# Altium PCB multiplexor checkpoint1.PcbDoc (part 1 of 2)
Units mil, origin at the board's own origin, x right, y up, seen from the top; angles counter-clockwise.
Board outline 12250 x 17250 mil, 4 copper layers (Top Layer, Middle 1, Middle 2, Bottom Layer), stack 59.2 mil thick; 172 components, 213 nets, 892 pads, 91 vias.
Unrouted connection lines stored in the file: 234.
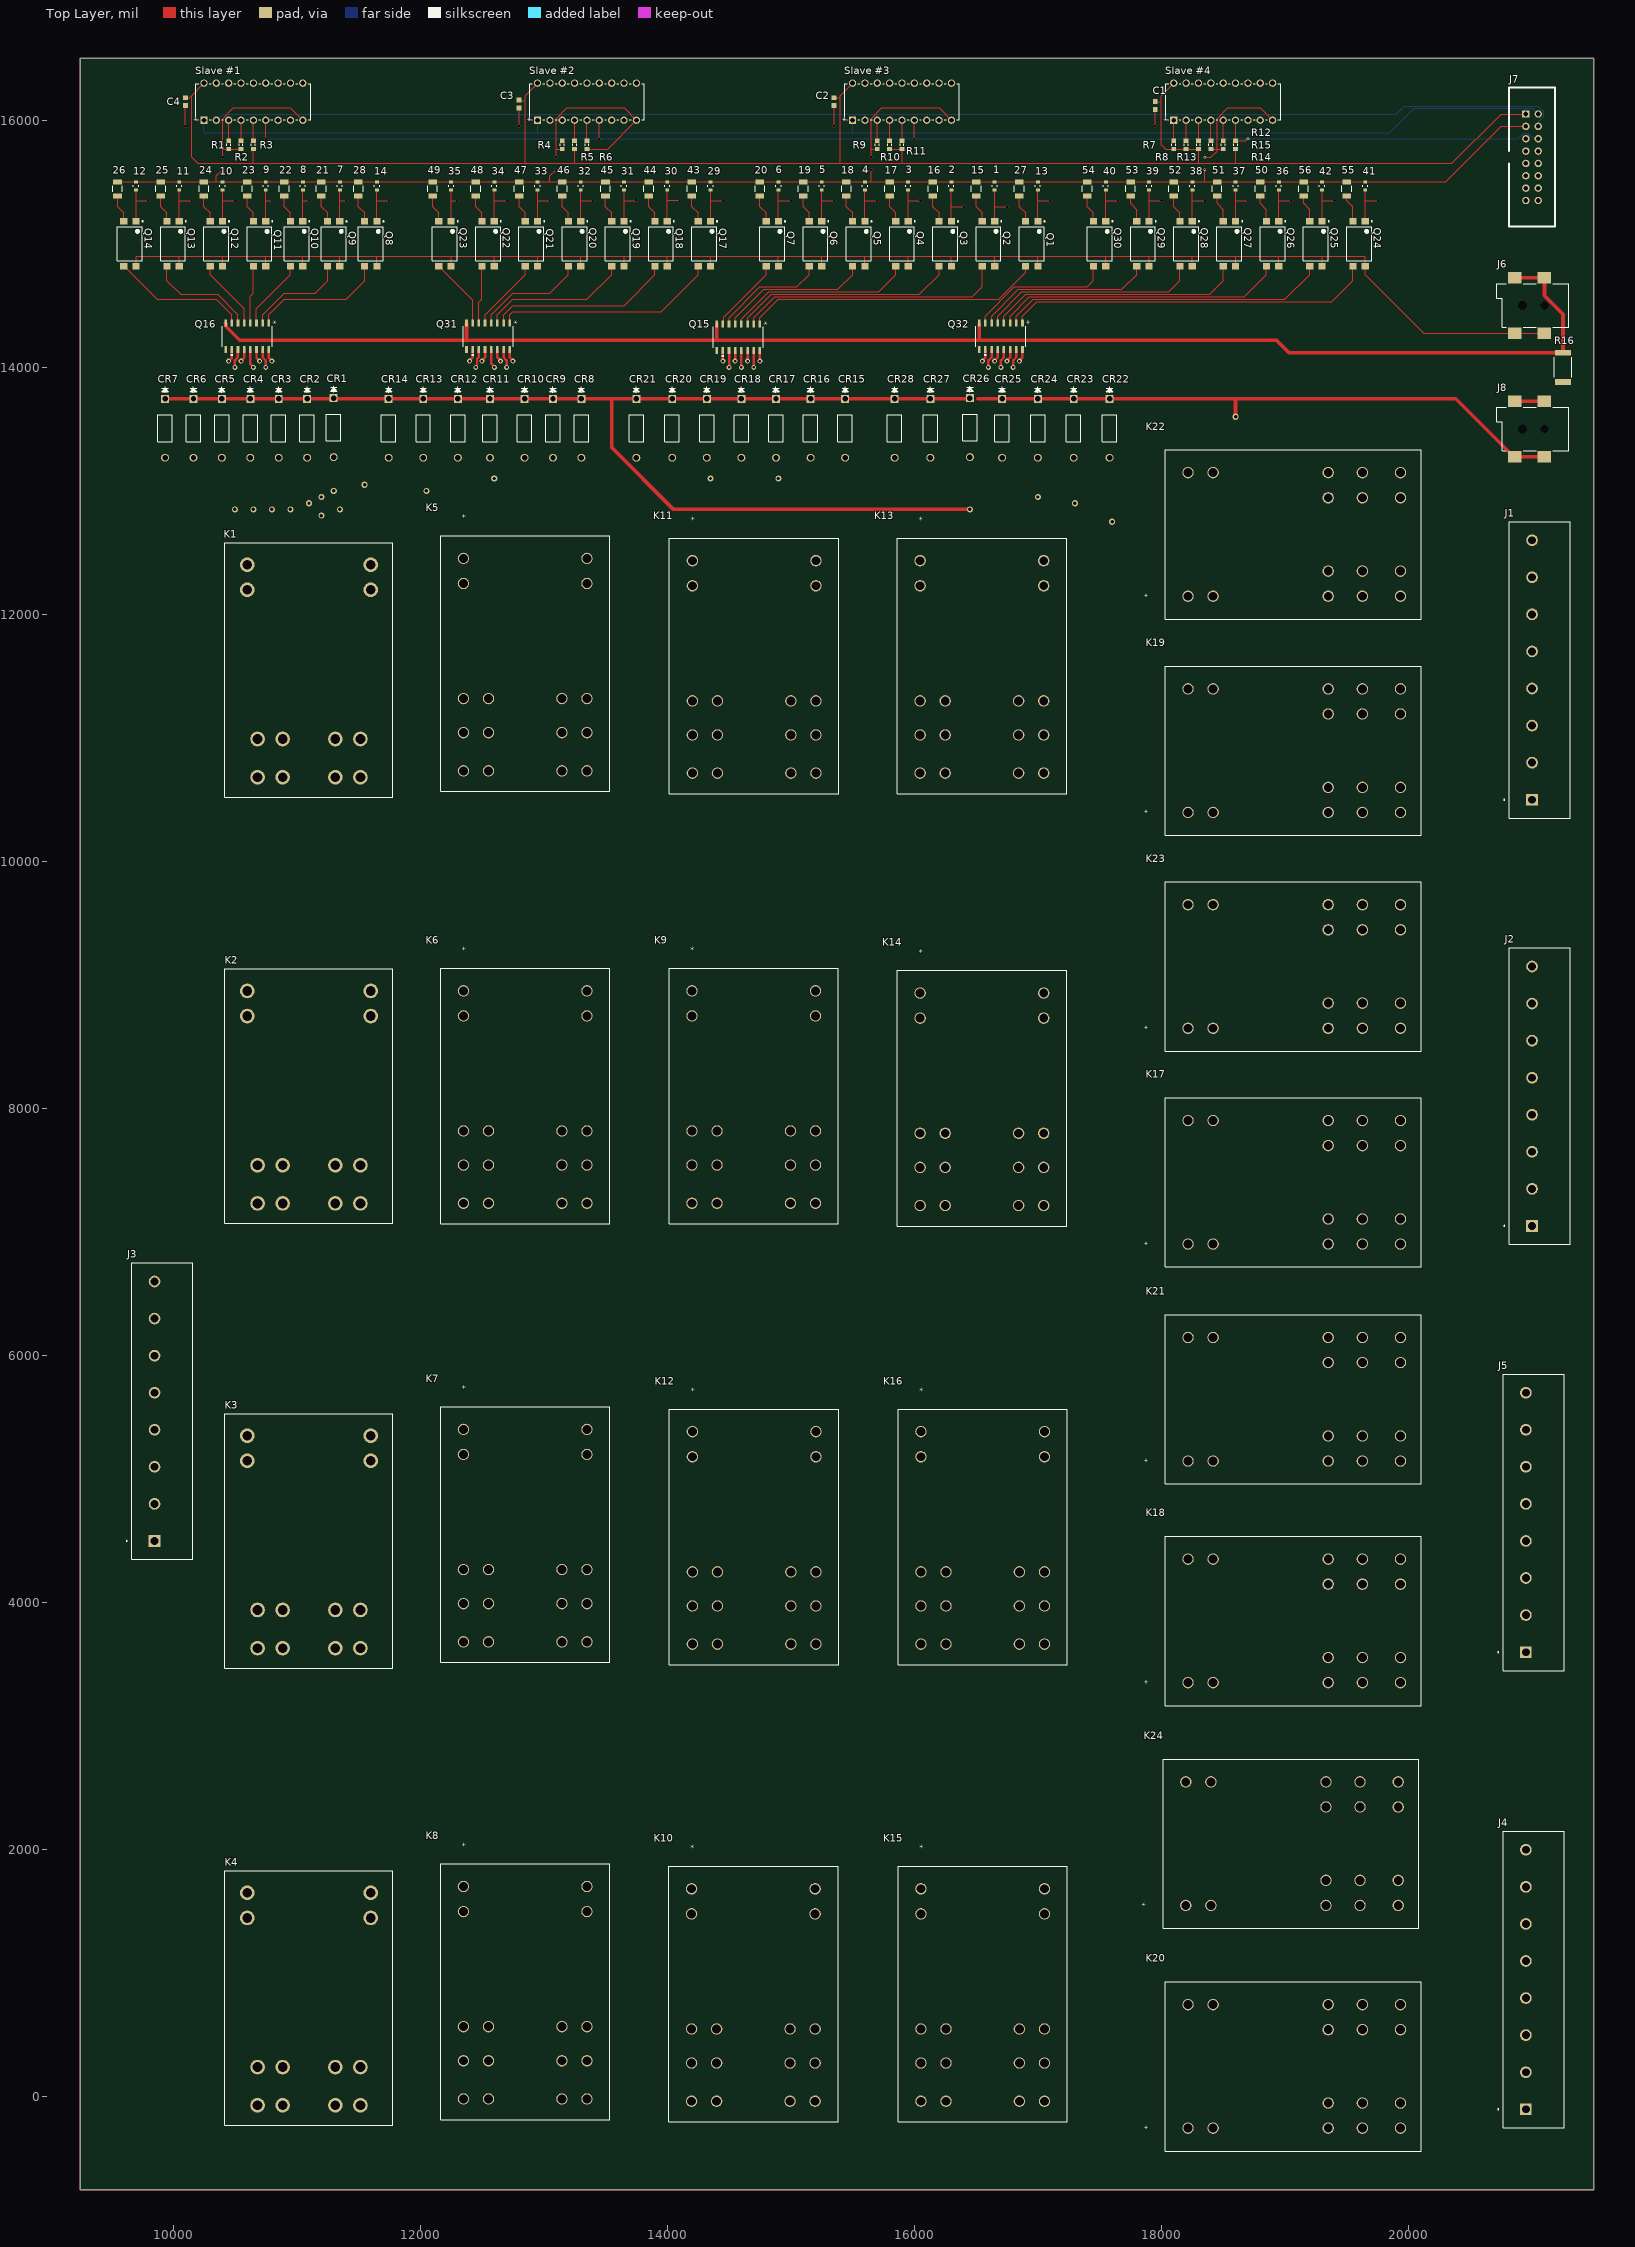
[diagram p0: Top Layer view]
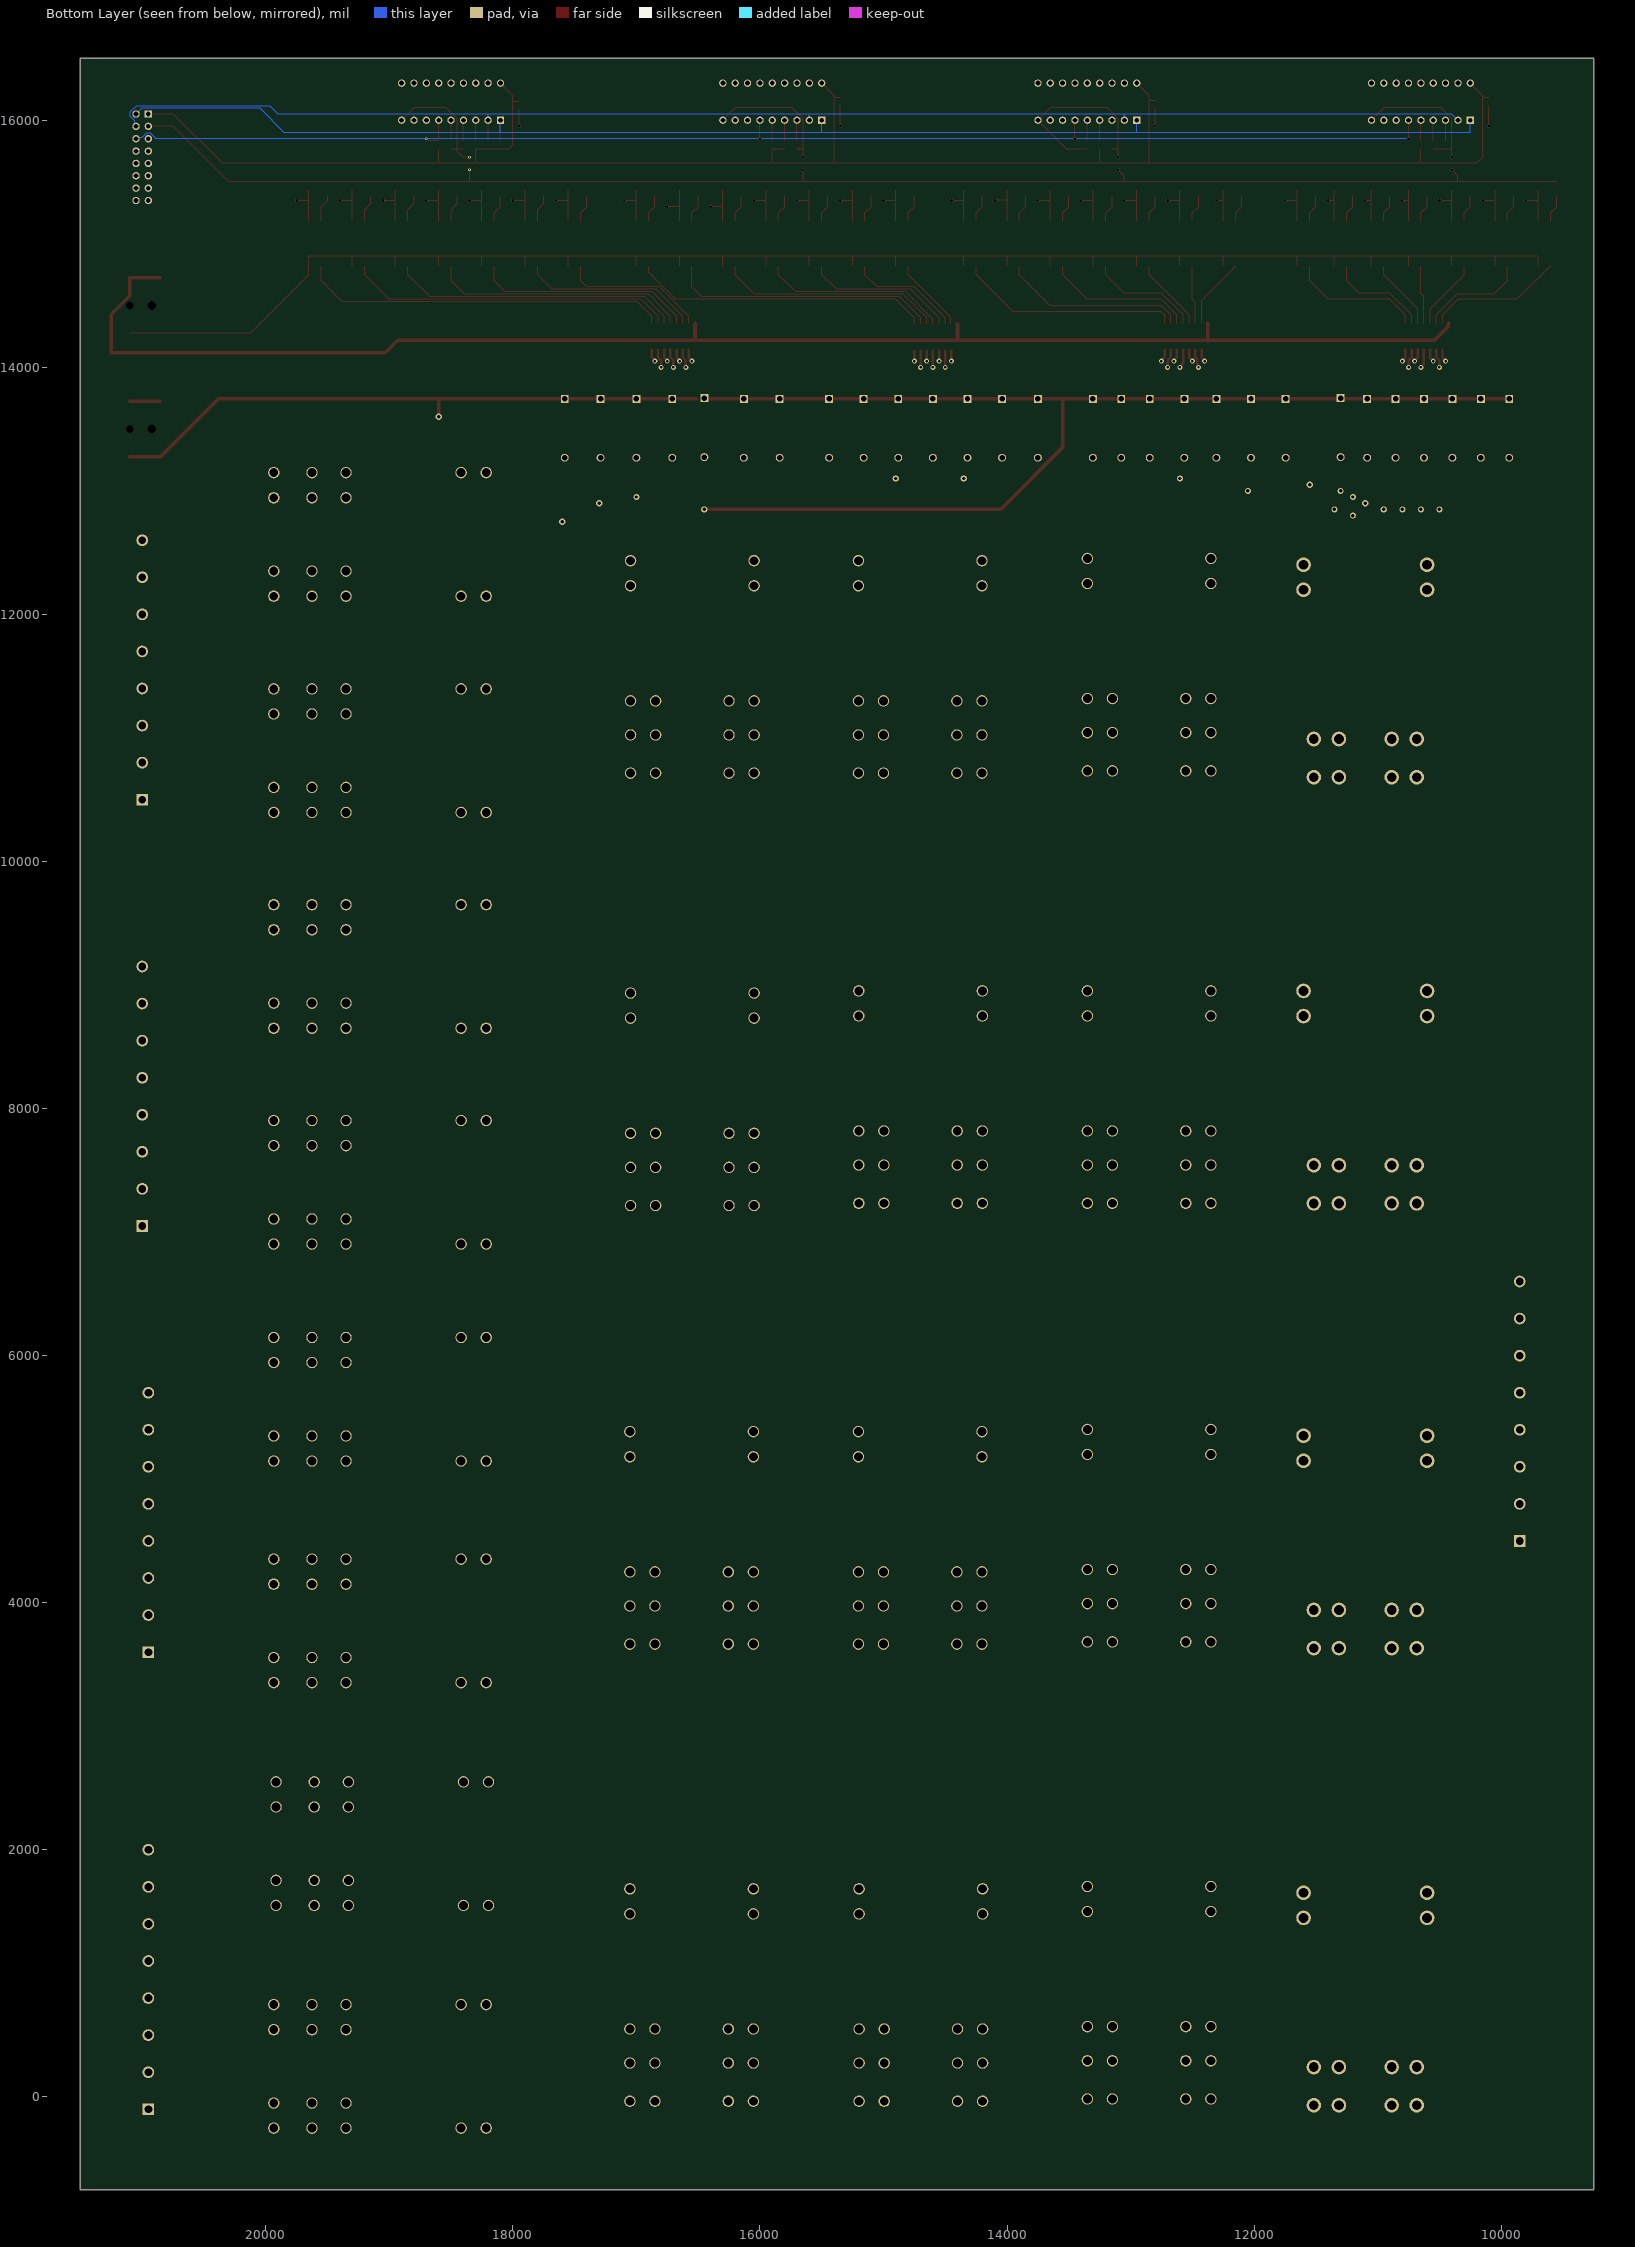
[diagram p1: Bottom Layer view, seen from below]
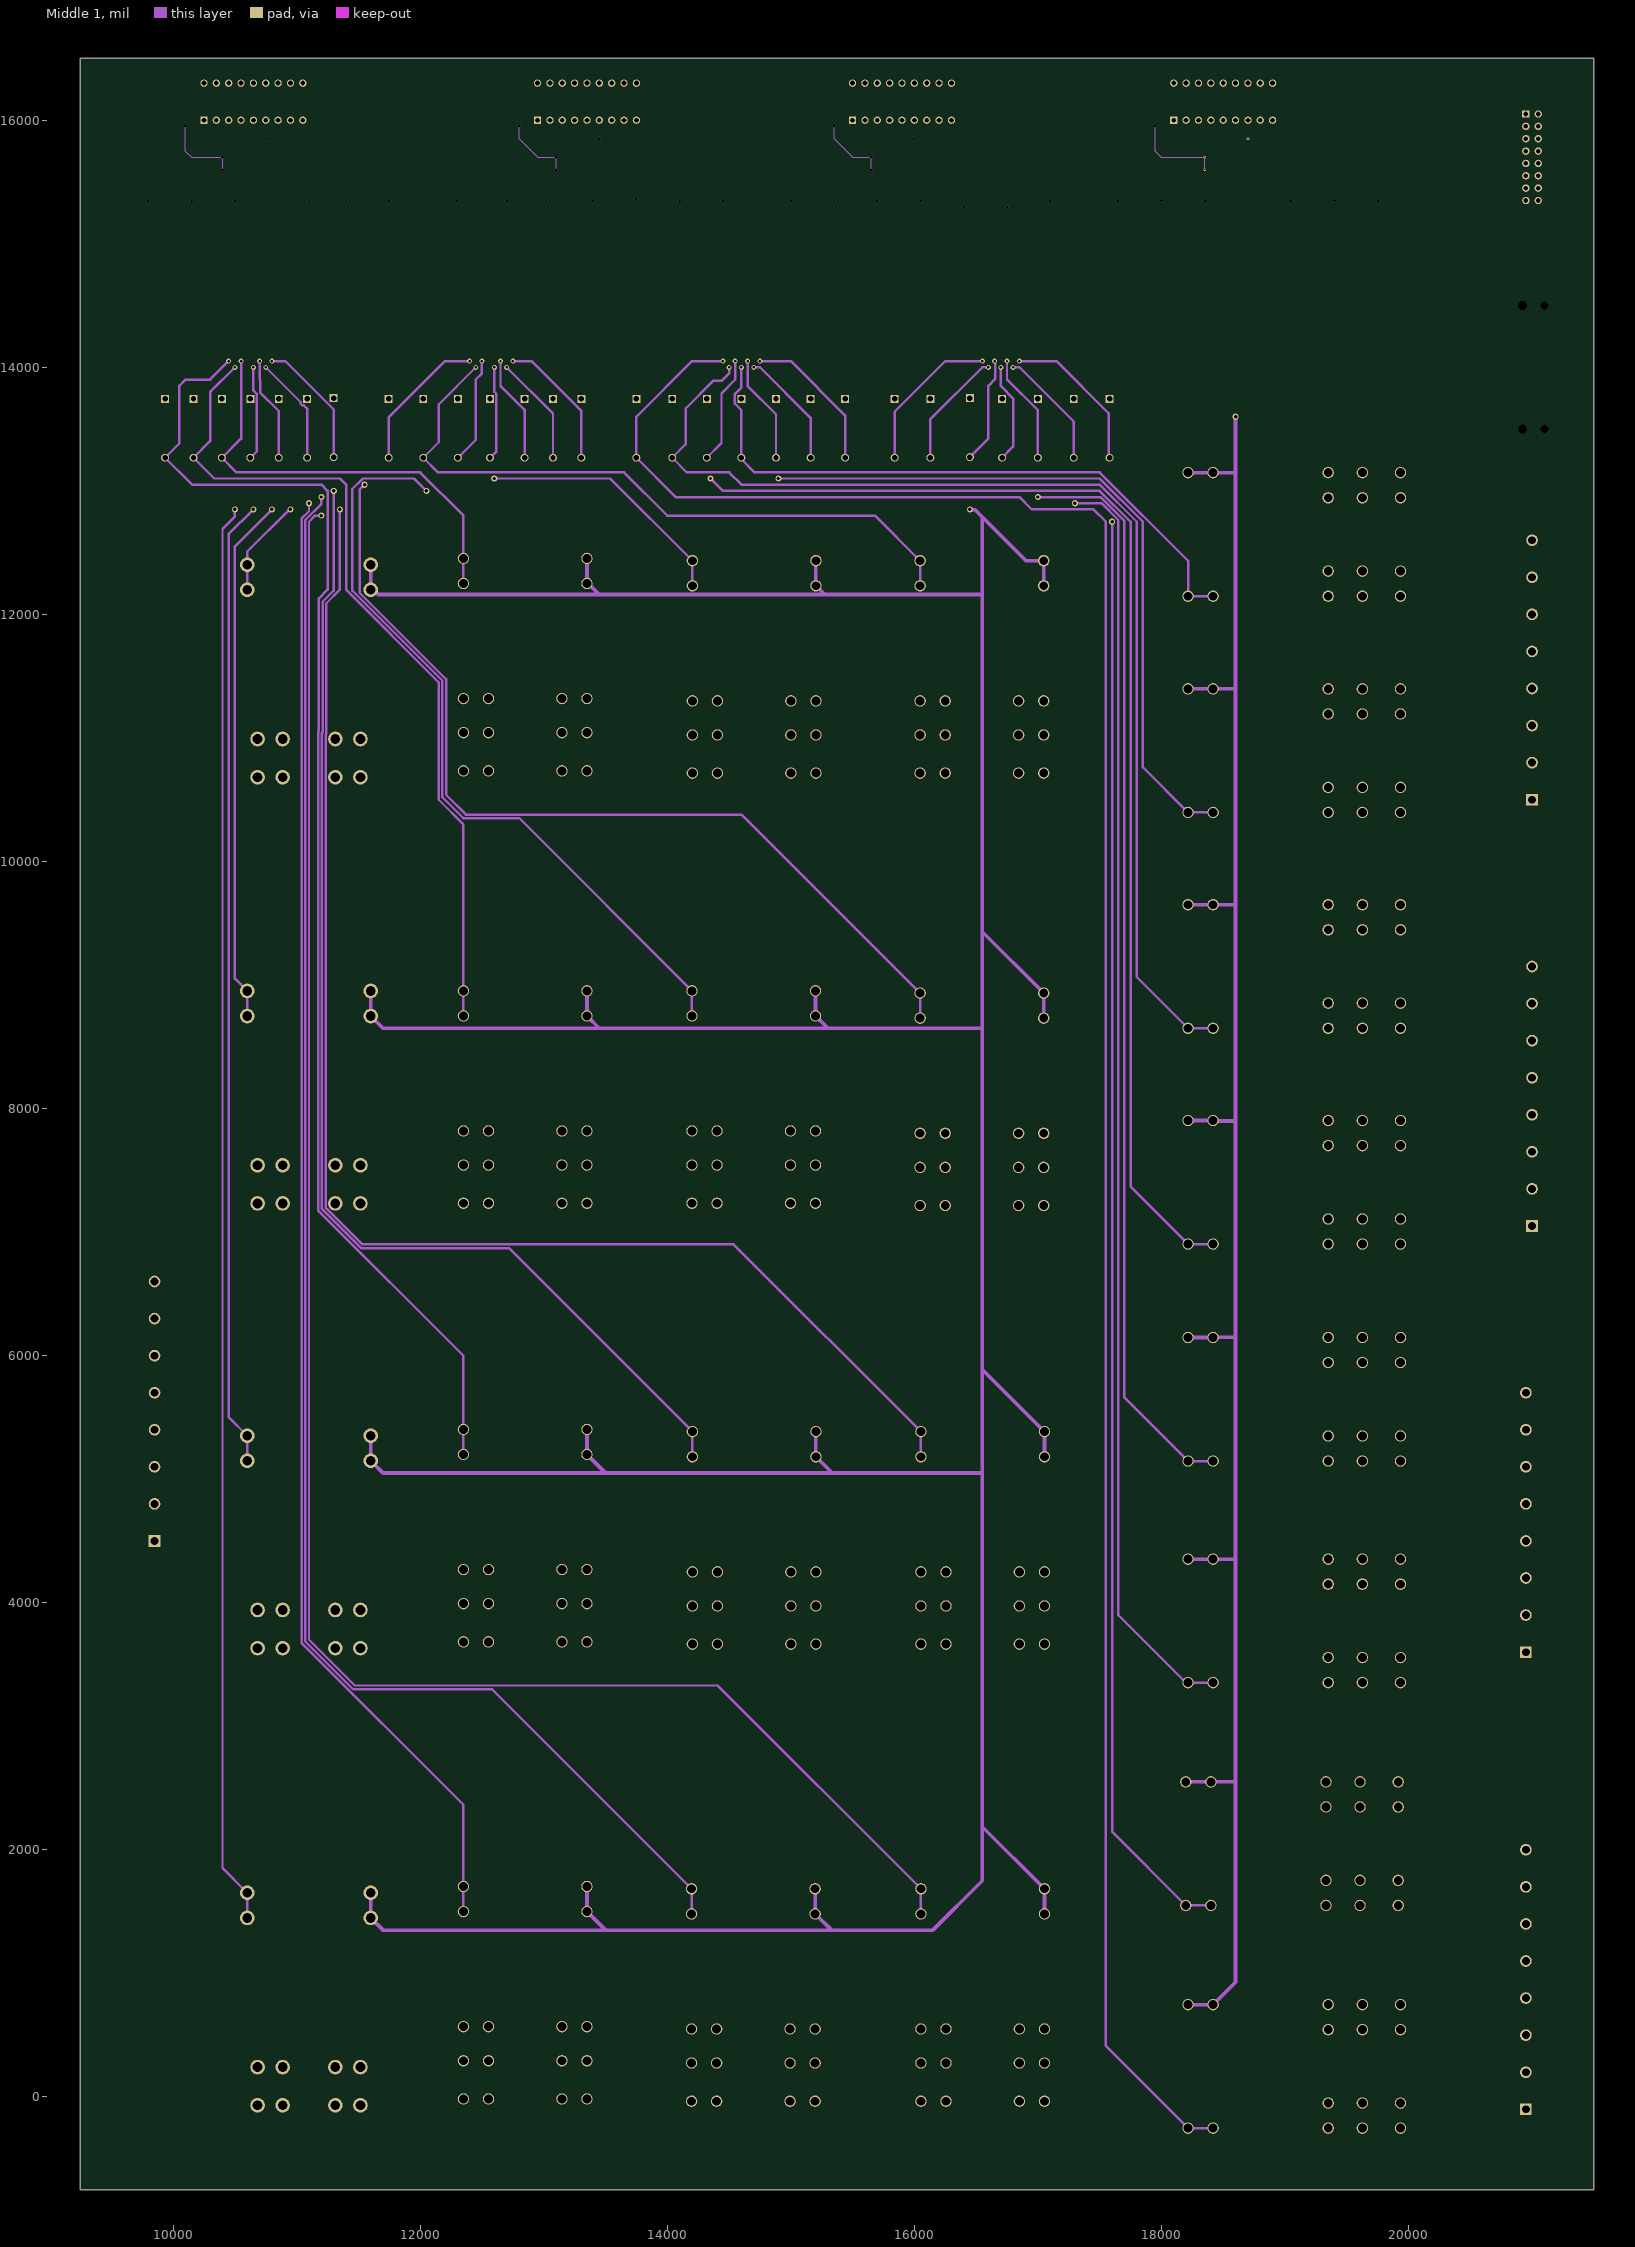
[diagram p2: Middle 1]
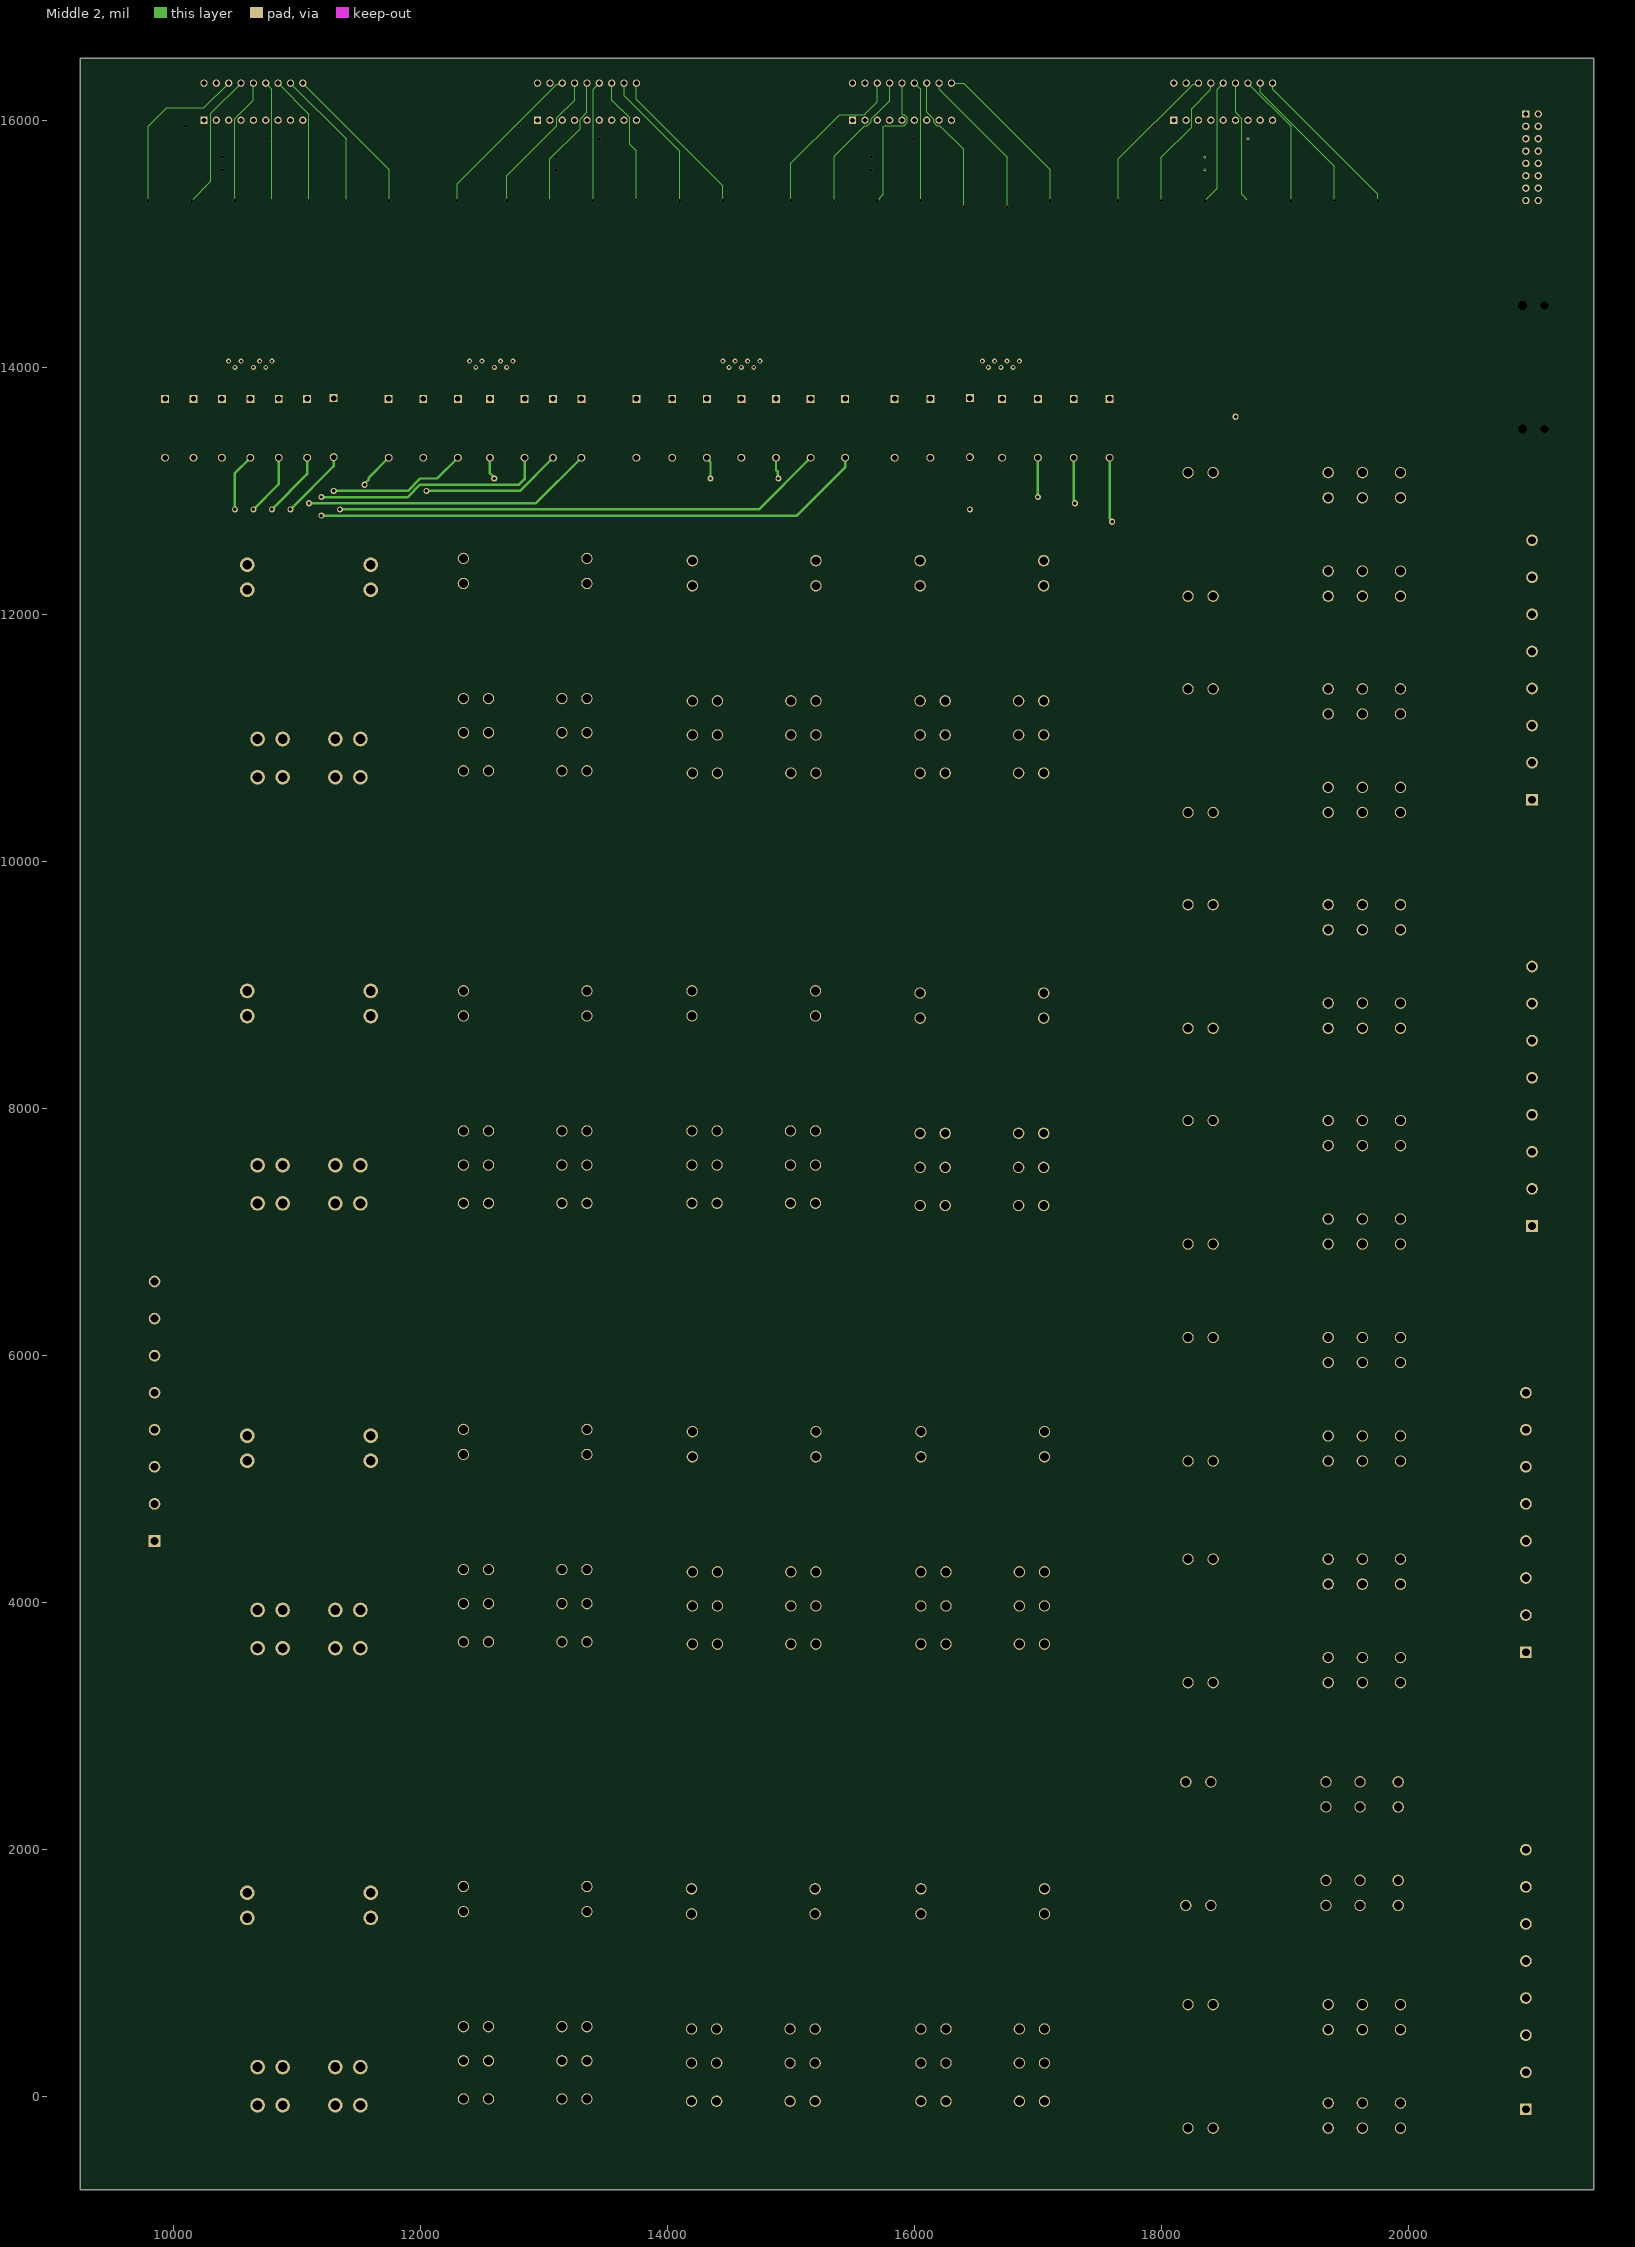
[diagram p3: Middle 2]

## Layer stack, top to bottom
Top Solder: solder mask 0.4, Solder Resist, Dk 3.5
Top Layer: signal copper 1.4
Dielectric 2: prepreg 9.2, PP-006, Dk 4.1
Middle 1: signal copper 1.4
Dielectric 1: dielectric 35.2, FR-4, Dk 4.8
Middle 2: signal copper 1.4
Dielectric 3: prepreg 9.2, PP-006, Dk 4.1
Bottom Layer: signal copper 1.4
Bottom Solder: solder mask 0.4, Solder Resist, Dk 3.5

## Board outline
9250,-750 9250,16500 21500,16500 21500,-750

## Design rules (kind name [scope] priority, off if disabled: settings)
BoardOutlineClearance [All] p1: gap=20 ignorepadtopadclearanceinfootprint=FALSE
Clearance [All] p1: gap=10 ignorepadtopadclearanceinfootprint=FALSE except(0: Arc-Hole Track-Hole SMDPad-Hole THPad-Hole Via-Hole Fill-Hole Poly-Hole Region-Hole Text-Hole; 20: Arc-Fill Arc-Poly Arc-Region Track-Fill Track-Poly Track-Region SMDPad-Fill SMDPad-Poly SMDPad-Region THPad-Fill THPad-Poly THPad-Region Via-Fill Via-Poly Via-Region Fill-Fill Fill-Poly Fill-Region Poly-Poly Poly-Region Region-Region)
HoleToHoleClearance [All] p1: gap=5 allowstackedmicrovias=TRUE
MinimumSolderMaskSliver [All] p1: minsoldermaskwidth=2
PlaneConnect [All] p1: planeconnectstyle=Direct reliefexpansion=20 reliefentries=4 reliefconductorwidth=10 reliefairgap=10
PolygonConnect [All] p1: connectstyle=Direct reliefconductorwidth=10 reliefentries=4 polygonreliefangle="90 Angle" airgapwidth=10
RoutingVias [All] p1: holewidth=22 width=22 viastyle="Through Hole" minholewidth=10 minwidth=22 maxholewidth=50 maxwidth=100
SilkToSilkClearance [All] p1: silktosilkclearance=1
SilkToSolderMaskClearance [IsPad] p1: minsilkscreentomaskgap=2 clearancetoexposedcopper=TRUE
SolderMaskExpansion [All] p1: expansion=4 istentingtop=FALSE
Width [All] p1: maxlimit=50 minlimit=10 preferedwidth=10 minimp=50.000000 maximp=50.000000 favimp=50.000000
25 further rules are at their usual default settings.

## Classes and differential pairs
component class "relay isolation circuit": 1 2 3 4 5 6 7 8 9 10 11 12 13 14 15 16 17 18 19 20 21 22 23 24 25 26 27 28 29 30 31 32 33 34 35 36 37 38 39 40 41 42 43 44 45 46 47 48 49 50 51 52 53 54 55 56 CR1 CR2 CR3 CR4 CR5 CR6 CR7 CR8 CR9 CR10 CR11 CR12 CR13 CR14 CR15 CR16 CR17 CR18 CR19 CR20 CR21 CR22 CR23 CR24 CR25 CR26 CR27 CR28 Q1 Q2 Q3 Q4 Q5 Q6 Q7 Q8 Q9 Q10 Q11 Q12 Q13 Q14 Q15 Q16 Q17 Q18 Q19 Q20 Q21 Q22 Q23 Q24 Q25 Q26 Q27 Q28 Q29 Q30 Q31 Q32
component class "Relay I2C to GPIO": C1 C2 C3 C4 J6 J7 J8 R1 R2 R3 R4 R5 R6 R7 R8 R9 R10 R11 R12 R13 R14 R15 R16 "Slave #1" "Slave #2" "Slave #3" "Slave #4"
component class "multiplexor circuit": J1 J2 J3 J4 J5 K1 K2 K3 K4 K5 K6 K7 K8 K9 K10 K11 K12 K13 K14 K15 K16 K17 K18 K19 K20 K21 K22 K23 K24

## Components (designator, comment, footprint, x,y, rotation, side; value= is the part's Value field where it differs from the comment)
1 "CL10A106MQ8NNNC" CAP_CL10_SAM 16650,15467.41 r270 top
2 "CL10A106MQ8NNNC" CAP_CL10_SAM 16300,15467.41 r270 top
3 "CL10A106MQ8NNNC" CAP_CL10_SAM 15950,15467.41 r270 top
4 "CL10A106MQ8NNNC" CAP_CL10_SAM 15600,15467.41 r270 top
5 "CL10A106MQ8NNNC" CAP_CL10_SAM 15250,15467.41 r270 top
6 "CL10A106MQ8NNNC" CAP_CL10_SAM 14900,15467.41 r270 top
7 "CL10A106MQ8NNNC" CAP_CL10_SAM 11350,15467.41 r270 top
8 "CL10A106MQ8NNNC" CAP_CL10_SAM 11050,15467.41 r270 top
9 "CL10A106MQ8NNNC" CAP_CL10_SAM 10750,15467.41 r270 top
10 "CL10A106MQ8NNNC" CAP_CL10_SAM 10400,15467.41 r270 top
11 "CL10A106MQ8NNNC" CAP_CL10_SAM 10050,15467.41 r270 top
12 "CL10A106MQ8NNNC" CAP_CL10_SAM 9700,15467.41 r270 top
13 "CL10A106MQ8NNNC" CAP_CL10_SAM 17000,15467.41 r270 top
14 "CL10A106MQ8NNNC" CAP_CL10_SAM 11650,15467.41 r270 top
15 "RMCF1206FT330R" STA_RMCF1206_STP 16500,15444 r270 top
16 "RMCF1206FT330R" STA_RMCF1206_STP 16150,15444 r270 top
17 "RMCF1206FT330R" STA_RMCF1206_STP 15800,15444 r270 top
18 "RMCF1206FT330R" STA_RMCF1206_STP 15450,15444 r270 top
19 "RMCF1206FT330R" STA_RMCF1206_STP 15100,15444 r270 top
20 "RMCF1206FT330R" STA_RMCF1206_STP 14750,15444 r270 top
21 "RMCF1206FT330R" STA_RMCF1206_STP 11200,15444 r270 top
22 "RMCF1206FT330R" STA_RMCF1206_STP 10900,15444 r270 top
23 "RMCF1206FT330R" STA_RMCF1206_STP 10600,15444 r270 top
24 "RMCF1206FT330R" STA_RMCF1206_STP 10250,15444 r270 top
25 "RMCF1206FT330R" STA_RMCF1206_STP 9900,15444 r270 top
26 "RMCF1206FT330R" STA_RMCF1206_STP 9550,15444 r270 top
27 "RMCF1206FT330R" STA_RMCF1206_STP 16850,15444 r270 top
28 "RMCF1206FT330R" STA_RMCF1206_STP 11500,15444 r270 top
29 "CL10A106MQ8NNNC" CAP_CL10_SAM 14350,15467.41 r270 top
30 "CL10A106MQ8NNNC" CAP_CL10_SAM 14000,15467.41 r270 top
31 "CL10A106MQ8NNNC" CAP_CL10_SAM 13650,15467.41 r270 top
32 "CL10A106MQ8NNNC" CAP_CL10_SAM 13300,15467.41 r270 top
33 "CL10A106MQ8NNNC" CAP_CL10_SAM 12950,15467.41 r270 top
34 "CL10A106MQ8NNNC" CAP_CL10_SAM 12600,15467.41 r270 top
35 "CL10A106MQ8NNNC" CAP_CL10_SAM 12250,15467.41 r270 top
36 "CL10A106MQ8NNNC" CAP_CL10_SAM 18950,15467.41 r270 top
37 "CL10A106MQ8NNNC" CAP_CL10_SAM 18600,15467.41 r270 top
38 "CL10A106MQ8NNNC" CAP_CL10_SAM 18250,15467.41 r270 top
39 "CL10A106MQ8NNNC" CAP_CL10_SAM 17900,15467.41 r270 top
40 "CL10A106MQ8NNNC" CAP_CL10_SAM 17550,15467.41 r270 top
41 "CL10A106MQ8NNNC" CAP_CL10_SAM 19650,15467.41 r270 top
42 "CL10A106MQ8NNNC" CAP_CL10_SAM 19300,15467.41 r270 top
43 "RMCF1206FT330R" STA_RMCF1206_STP 14200,15444 r270 top
44 "RMCF1206FT330R" STA_RMCF1206_STP 13850,15444 r270 top
45 "RMCF1206FT330R" STA_RMCF1206_STP 13500,15444 r270 top
46 "RMCF1206FT330R" STA_RMCF1206_STP 13150,15444 r270 top
47 "RMCF1206FT330R" STA_RMCF1206_STP 12800,15444 r270 top
48 "RMCF1206FT330R" STA_RMCF1206_STP 12450,15444 r270 top
49 "RMCF1206FT330R" STA_RMCF1206_STP 12100,15444 r270 top
50 "RMCF1206FT330R" STA_RMCF1206_STP 18800,15444 r270 top
51 "RMCF1206FT330R" STA_RMCF1206_STP 18450,15444 r270 top
52 "RMCF1206FT330R" STA_RMCF1206_STP 18100,15444 r270 top
53 "RMCF1206FT330R" STA_RMCF1206_STP 17750,15444 r270 top
54 "RMCF1206FT330R" STA_RMCF1206_STP 17400,15444 r270 top
55 "RMCF1206FT330R" STA_RMCF1206_STP 19500,15444 r270 top
56 "RMCF1206FT330R" STA_RMCF1206_STP 19150,15444 r270 top
C1 "GCM188R71H104KA57D" CAPC1608N_NP 17950,16118.5 r270 top value=100n
C2 "GCM188R71H104KA57D" CAPC1608N_NP 15350,16150 r270 top value=100n
C3 "GCM188R71H104KA57D" CAPC1608N_NP 12800,16131.5 r270 top value=100n
C4 "GCM188R71H104KA57D" CAPC1608N_NP 10100,16150 r270 top value=100n
CR1 "1N4007-G" 1N4-G 11300,13750 r270 top
CR2 "1N4007-G" 1N4-G 11085,13745 r270 top
CR3 "1N4007-G" 1N4-G 10855,13745 r270 top
CR4 "1N4007-G" 1N4-G 10625,13745 r270 top
CR5 "1N4007-G" 1N4-G 10395,13745 r270 top
CR6 "1N4007-G" 1N4-G 10165,13745 r270 top
CR7 "1N4007-G" 1N4-G 9935,13745 r270 top
CR8 "1N4007-G" 1N4-G 13305,13745 r270 top
CR9 "1N4007-G" 1N4-G 13075,13745 r270 top
CR10 "1N4007-G" 1N4-G 12845,13745 r270 top
CR11 "1N4007-G" 1N4-G 12565,13745 r270 top
CR12 "1N4007-G" 1N4-G 12305,13745 r270 top
CR13 "1N4007-G" 1N4-G 12025,13745 r270 top
CR14 "1N4007-G" 1N4-G 11745,13745 r270 top
CR15 "1N4007-G" 1N4-G 15440,13745 r270 top
CR16 "1N4007-G" 1N4-G 15160,13745 r270 top
CR17 "1N4007-G" 1N4-G 14880,13745 r270 top
CR18 "1N4007-G" 1N4-G 14600,13745 r270 top
CR19 "1N4007-G" 1N4-G 14320,13745 r270 top
CR20 "1N4007-G" 1N4-G 14040,13745 r270 top
CR21 "1N4007-G" 1N4-G 13750,13745 r270 top
CR22 "1N4007-G" 1N4-G 17580,13745 r270 top
CR23 "1N4007-G" 1N4-G 17290,13745 r270 top
CR24 "1N4007-G" 1N4-G 17000,13745 r270 top
CR25 "1N4007-G" 1N4-G 16710,13745 r270 top
CR26 "1N4007-G" 1N4-G 16450,13750 r270 top
CR27 "1N4007-G" 1N4-G 16130,13745 r270 top
CR28 "1N4007-G" 1N4-G 15840,13745 r270 top
J1 "TB005-762-08BE" CUI_TB005-762-08BE 21000,10500 r90 top
J2 "TB005-762-08BE" CUI_TB005-762-08BE 21000,7050 r90 top
J3 "TB005-762-08BE" CUI_TB005-762-08BE 9850,4500 r90 top
J4 "TB005-762-08BE" CUI_TB005-762-08BE 20950,-100 r90 top
J5 "TB005-762-08BE" CUI_TB005-762-08BE 20950,3600 r90 top
J6 "PJ-002AH-SMT" PJ-002AH-SMT 21100,14500 r180 top
J7 "N2510-6002-RB" 2516-6002UB 20950,16050 r270 top
J8 "PJ-002AH-SMT" PJ-002AH-SMT 21100,13500 r180 top
K1 "6-1423008-7" RELAY_6-1423008-7 11100,11550 r270 top
K2 "6-1423008-7" RELAY_6-1423008-7 11100,8100 r270 top
K3 "6-1423008-7" RELAY_6-1423008-7 11100,4500 r270 top
K4 "6-1423008-7" RELAY_6-1423008-7 11100,800 r270 top
K5 "T92S11D12-24" T92S11D12-24_TEC 12350,12453 r0 top
K6 "T92S11D12-24" T92S11D12-24_TEC 12350,8953 r0 top
K7 "T92S11D12-24" T92S11D12-24_TEC 12350,5403 r0 top
K8 "T92S11D12-24" T92S11D12-24_TEC 12350,1703 r0 top
K9 "T92S11D12-24" T92S11D12-24_TEC 14200,8953 r0 top
K10 "T92S11D12-24" T92S11D12-24_TEC 14197,1684.5 r0 top
K11 "T92S11D12-24" T92S11D12-24_TEC 14203,12434.5 r0 top
K12 "T92S11D12-24" T92S11D12-24_TEC 14203,5384.5 r0 top
K13 "T92S11D12-24" T92S11D12-24_TEC 16047,12434.5 r0 top
K14 "T92S11D12-24" T92S11D12-24_TEC 16047,8934.5 r0 top
K15 "T92S11D12-24" T92S11D12-24_TEC 16053,1684.5 r0 top
K16 "T92S11D12-24" T92S11D12-24_TEC 16053,5384.5 r0 top
K17 "T92S11D12-24" T92S11D12-24_TEC 18215.5,6903 r90 top
K18 "T92S11D12-24" T92S11D12-24_TEC 18215.5,3353 r90 top
K19 "T92S11D12-24" T92S11D12-24_TEC 18215.5,10397 r90 top
K20 "T92S11D12-24" T92S11D12-24_TEC 18215.5,-253 r90 top
K21 "T92S11D12-24" T92S11D12-24_TEC 18215.5,5147 r90 top
K22 "T92S11D12-24" T92S11D12-24_TEC 18215.5,12147 r90 top
K23 "T92S11D12-24" T92S11D12-24_TEC 18215.5,8650 r90 top
K24 "T92S11D12-24" T92S11D12-24_TEC 18197,1550 r90 top
Q1 "FOD817DSD" FP-709AH-MFG 16950,15000 r270 top
Q2 "FOD817DSD" FP-709AH-MFG 16600,15000 r270 top
Q3 "FOD817DSD" FP-709AH-MFG 16250,15000 r270 top
Q4 "FOD817DSD" FP-709AH-MFG 15900,15000 r270 top
Q5 "FOD817DSD" FP-709AH-MFG 15550,15000 r270 top
Q6 "FOD817DSD" FP-709AH-MFG 15200,15000 r270 top
Q7 "FOD817DSD" FP-709AH-MFG 14850,15000 r270 top
Q8 "FOD817DSD" FP-709AH-MFG 11600,15000 r270 top
Q9 "FOD817DSD" FP-709AH-MFG 11300,15000 r270 top
Q10 "FOD817DSD" FP-709AH-MFG 11000,15000 r270 top
Q11 "FOD817DSD" FP-709AH-MFG 10700,15000 r270 top
Q12 "FOD817DSD" FP-709AH-MFG 10350,15000 r270 top
Q13 "FOD817DSD" FP-709AH-MFG 10000,15000 r270 top
Q14 "FOD817DSD" FP-709AH-MFG 9650,15000 r270 top
Q15 "MC1413BDR2G" SOIC16_751B-05_ONS 14575,14242.75 r270 top
Q16 "MC1413BDR2G" SOIC16_751B-05_ONS 10600,14250 r270 top
Q17 "FOD817DSD" FP-709AH-MFG 14300,15000 r270 top
Q18 "FOD817DSD" FP-709AH-MFG 13950,15000 r270 top
Q19 "FOD817DSD" FP-709AH-MFG 13600,15000 r270 top
Q20 "FOD817DSD" FP-709AH-MFG 13250,15000 r270 top
Q21 "FOD817DSD" FP-709AH-MFG 12900,15000 r270 top
Q22 "FOD817DSD" FP-709AH-MFG 12550,15000 r270 top
Q23 "FOD817DSD" FP-709AH-MFG 12200,15000 r270 top
Q24 "FOD817DSD" FP-709AH-MFG 19600,15000 r270 top
Q25 "FOD817DSD" FP-709AH-MFG 19250,15000 r270 top
Q26 "FOD817DSD" FP-709AH-MFG 18900,15000 r270 top
Q27 "FOD817DSD" FP-709AH-MFG 18550,15000 r270 top
Q28 "FOD817DSD" FP-709AH-MFG 18200,15000 r270 top
Q29 "FOD817DSD" FP-709AH-MFG 17850,15000 r270 top
Q30 "FOD817DSD" FP-709AH-MFG 17500,15000 r270 top
Q31 "MC1413BDR2G" SOIC16_751B-05_ONS 12550,14250 r270 top
Q32 "MC1413BDR2G" SOIC16_751B-05_ONS 16700,14250 r270 top
R1 "0603_k4.7K" RESC1608N 10450,15800 r90 top value=4.7K
R2 "0603_k4.7K" RESC1608N 10550,15800 r90 top value=4.7K
R3 "0603_k4.7K" RESC1608N 10650,15800 r90 top value=4.7K
R4 "0603_k4.7K" RESC1608N 13150,15800 r90 top value=4.7K
R5 "0603_k4.7K" RESC1608N 13250,15800 r90 top value=4.7K
R6 "0603_k4.7K" RESC1608N 13350,15800 r90 top value=4.7K
R7 "0603_k4.7K" RESC1608N 18100,15800 r270 top value=4.7K
R8 "0603_k4.7K" RESC1608N 18200,15800 r90 top value=4.7K
R9 "0603_k4.7K" RESC1608N 15700,15800 r90 top value=4.7K
R10 "0603_k4.7K" RESC1608N 15800,15800 r90 top value=4.7K
R11 "0603_k4.7K" RESC1608N 15900,15800 r90 top value=4.7K
R12 "0603_k4.7K" RESC1608N 18600,15800 r90 top value=4.7K
R13 "0603_k4.7K" RESC1608N 18300,15800 r90 top value=4.7K
R14 "0603_k4.7K" RESC1608N 18400,15800 r90 top value=4.7K
R15 "0603_k4.7K" RESC1608N 18500,15800 r90 top value=4.7K
R16 "CR2512-J/-000ELF" BO_CR2512 21250,14000 r270 top
"Slave #1" "MCP23008-E/P" PDIP18_300MC_MCH 10250,16000 r90 top
"Slave #2" "MCP23008-E/P" PDIP18_300MC_MCH 12950,16000 r90 top
"Slave #3" "MCP23008-E/P" PDIP18_300MC_MCH 15500,16000 r90 top
"Slave #4" "MCP23008-E/P" PDIP18_300MC_MCH 18100,16000 r90 top

## Footprints (in the part's own frame and the unit in brackets; to place one, negate y for a bottom-side part, rotate by r counter-clockwise, add the part's x,y. Pads: shape width x height; smd on the part's side, far side on the other; paste and mask are expansions set on the pad)
1N4-G [mil]
  rect 64x64 hole 44 mask+0: 1(0,0)
  round 64 hole 44 mask+0: 2(477,0)
  silkscreen extent -97,-58 346,59, body extent 0,0 10,10, height 10
2516-6002UB [mil] "16 PIN JTAG Header 0.1\""
  rect 60x60 hole 37: 1(0,0)
  round 60 hole 37: 2(0,100) 3(100,0) 4(100,100) 5(200,0) 6(200,100) 7(300,0) 8(300,100) 9(400,0) 10(400,100) 11(500,0) 12(500,100) 13(600,0) 14(600,100) 15(700,0) 16(700,100)
  silkscreen extent -217,-138 910,236
BO_CR2512 [mil]
  rect 48x130 smd paste+0 mask+0: 1(-118,0) 2(118,0)
  silkscreen extent -82,-70 82,70, body extent -128,-65 128,65, height 30
CAP_CL10_SAM [mm]
  rect 0.656x0.8 smd paste+0 mask+0: 1(-0.828,0) 2(0.828,0)
  silkscreen extent -0.19,-0.53 0.19,0.53, body extent -0.8,-0.4 0.8,0.4, height 0.9
CAPC1608N_NP [mm] "Chip Capacitor, Body 1.6x0.8mm, IPC Medium Density"
  rect 1x1 smd: 1(-0.8,0) 2(0.8,0)
  body extent -0.87,-0.48 0.87,0.48, height 0.85
CUI_TB005-762-08BE [mm]
  rect 2.4x2.4 hole 1.6: 1(0,0)
  round 2.4 hole 1.6: 2(7.62,0) 3(15.24,0) 4(22.86,0) 5(30.48,0) 6(38.1,0) 7(45.72,0) 8(53.34,0)
  silkscreen extent -3.81,-7.9 57.15,5.8
FP-709AH-MFG [mm]
  rect 1.3x1.5 smd paste+0 mask+0: 1(-4.6,1.27) 2(-4.6,-1.27) 3(4.6,-1.27) 4(4.6,1.27)
  silkscreen extent -4.72,-2.55 3.5,2.75, body extent -5.35,-2.65 5.35,2.65, height 0.25
PDIP18_300MC_MCH [mil]
  rect 59x59 hole 39 mask+0: 1(0,0)
  round 59 hole 39 mask+0: 2(0,-100) 3(0,-200) 4(0,-300) 5(0,-400) 6(0,-500) 7(0,-600) 8(0,-700) 9(0,-800) 10(300,-800) 11(300,-700) 12(300,-600) 13(300,-500) 14(300,-400) 15(300,-300) 16(300,-200) 17(300,-100) 18(300,0)
  silkscreen extent 5,-865 295,65, body extent -5,-860 315,60, height 215
PJ-002AH-SMT [mm] "Footprint for 2.1mm x 5.5mm Barel Jack can be used for other parts besides PJ-002AH-SMT"
  rect 2.8x2.4 smd: 1(0,5.7) 1(6.1,5.7) 2(0,-5.7) 3(6.1,-5.7)
  round 0 hole 1.6 unplated: 4(0,0)
  round 1.6 hole 1.8 unplated: 5(4.5,0)
  silkscreen extent -5,-4.5 9.8,4.5, body extent -5,-6.3 9.8,6.3, height 11
RELAY_6-1423008-7 [mm]
  round 3.009 hole 2.006: 0_1(-16.48,12.7) 0_2(-21.64,12.7) 1_1(-16.48,-12.7) 1_2(-21.64,-12.7) 2_1(22.04,5.42) 2_2(22.04,10.58) 4_1(14.19,5.42) 4_2(14.19,10.58) 6_1(22.04,-10.58) 6_2(22.04,-5.42) 8_1(14.19,-10.58) 8_2(14.19,-5.42)
  silkscreen extent -26.16,-17.27 26.16,17.27
RESC1608N [mm] "Chip Resistor, Body 1.6x0.8mm, IPC Medium Density"
  rect 0.9x1 smd: 1(-0.85,0) 2(0.85,0)
  silkscreen extent -0.2,-0.4 0.2,0.4, body extent -0.85,-0.48 0.85,0.48, height 0.6
SOIC16_751B-05_ONS [mil]
  rect 57.5x21 smd paste+0 mask+0: 1(-107.25,175) 2(-107.25,125) 3(-107.25,75) 4(-107.25,25) 5(-107.25,-25) 6(-107.25,-75) 7(-107.25,-125) 8(-107.25,-175) 9(107.25,-175) 10(107.25,-125) 11(107.25,-75) 12(107.25,-25) 13(107.25,25) 14(107.25,75) 15(107.25,125) 16(107.25,175)
  silkscreen extent -84,-202 156,202, body extent -122,-196 122,196, height 69
STA_RMCF1206_STP [mil]
  rect 40x69 smd paste+0 mask+0: 1(-56,0) 2(56,0)
  silkscreen extent -24,-40 24,40, body extent -68,-34 68,34, height 28
T92S11D12-24_TEC [mil]
  round 92 hole 72: 1(0,0) 2(0,-203) 3(0,-1134.5) 4(203,-1134.5) 5(0,-1410.5) 6(203,-1410.5) 7(0,-1719.5) 8(203,-1719.5) 9(1000,-1719.5) 10(797,-1719.5) 11(1000,-1410.5) 12(797,-1410.5) 13(1000,-1134.5) 14(797,-1134.5) 15(1000,-203) 16(1000,0)
  silkscreen extent -185,-1886 1185,184, body extent 0,0 10,10, height 10

## Part data
1 2 3 4 5 6 7 8 9 10 11 12 13 14 29 30 31 32 33 34 35 36 37 38 39 40 41 42: "No Description Available", Mfr_Name=Samsung, Copyright="Copyright (C) 2022 Ultra Librarian. All rights reserved.", Digi-Key_Part_Number_1=1276-1119-2-ND, Digi-Key_Part_Number_2=1276-1119-1-ND, Digi-Key_Part_Number_3=1276-1119-6-ND, Manufacturer_Part_Number=CL10A106MQ8NNNC, RefDes=RefDes, Type=DEV
15 16 17 18 19 20 21 22 23 24 25 26 27 28 43 44 45 46 47 48 49 50 51 52 53 54 55 56: "No Description Available", Mfr_Name="Stackpole International", Copyright="Copyright (C) 2022 Ultra Librarian. All rights reserved.", Digi-Key_Part_Number_1=RMCF1206FT330RCT-ND, Digi-Key_Part_Number_2=RMCF1206FT330RDKR-ND, Digi-Key_Part_Number_3=RMCF1206FT330RTR-ND, Manufacturer_Part_Number=RMCF1206FT330R, RefDes=RefDes, Type=DEV
C1 C2 C3 C4: library part CAP_n100n_0603_50V, "Cap 100nF, 50V, X7R, Ceramic, 1608(0603)", DIELECTRIC=X7R, Manufacturer="Murata Electronics North America", Supplier Part Number 1=490-4779-1-ND, TOLERANCE=10%, Value_Sort=100e-9, VOLTAGE=50, ComponentLink1Description=Datasheet, ComponentLink1URL=http://search.murata.co.jp/Ceramy/image/img/PDF/ENG/GCM188R71H104KA57.pdf, HelpURL=http://search.digikey.com/scripts/DkSearch/dksus.dll?Detail&name=490-4779-1-ND, LatestRevisionAuthor="David Class", Manufacturer Part Number=GCM188R71H104KA57D, PackageReference=1608[0603], Supplier 1=Digi-Key, TEXT="50V  0603"
CR1 CR2 CR3 CR4 CR5 CR6 CR7 CR8 CR9 CR10 CR11 CR12 CR13 CR14 CR15 CR16 CR17 CR18 CR19 CR20 CR21 CR22 CR23 CR24 CR25 CR26 CR27 CR28: "No Description Available", Mfr_Name=Comchip, Copyright="Copyright (C) 2022 Ultra Librarian. All rights reserved.", Digi-Key_Part_Number_1=641-1312-1-ND, Digi-Key_Part_Number_2=641-1312-3-ND, Manufacturer_Part_Number=1N4007-G, RefDes=RefDes, Type=DEV
J1 J2 J3 J4 J5: Package=None, Availability=Unavailable, MP=TB005-762-08BE, Price=None
J6 J8: "2.1mm x 5.5mm Barrel Jack 5A@24V 30mOhm Contact Resistance", Manufacturer="CUI Inc", Supplier Part Number 1=CP-002AHPJCT-ND, ComponentLink1Description=Datasheet, ComponentLink1URL=http://www.cui.com/pdffiles/PJ-002AH-SMT.pdf, ComponentLink2Description="Manufacturer Website", ComponentLink2URL=http://www.cui.com/adtemplate.asp?invky=501659, HelpURL=http://search.digikey.com/scripts/DkSearch/dksus.dll?Detail&name=CP-002AHPJCT-ND, LatestRevisionAuthor="David Class", LatestRevisionComment="rev2 - decresed hole size by .1mm check footprint", LatestRevisionDate=24-Nov-09, Manufacturer Part Number=PJ-002AH-SMT, Mounting Type=SM, Supplier 1=Digi-Key
J7: library part JTAG_Actel_10, "CONN HEADER 10 POS STRGHT GOLD", Color=Black, Manufacturer=3M, Supplier Part Number 1=MHC10K-ND, Category="Connectors, Interconnects", ComponentLink1Description=http://multimedia.3m.com/mws/mediawebserver?66666UuZjcFSLXTtMXM6MxfcEVuQEcuZgVs6EVs6E666666--, ComponentLink1URL=http://multimedia.3m.com/mws/mediawebserver?66666UuZjcFSLXTtMXM6MxfcEVuQEcuZgVs6EVs6E666666--, Connector Type="Header, Shrouded", Contact Finish=Gold, Contact Finish Thickness="30µin (0.76µm)", Contact Mating Length="0.243\" (6.17mm)", Contact Type="Male Pin", Fastening Type=-, Features=-, Manufacturer Part Number=N2510-6002-RB, Mounting Type="Through Hole", Number of Positions=10, Number of Positions Loaded=All, Number of Rows=2, Packaging=Bulk, Pitch="0.100\" (2.54mm)", Pricing 1="1=1.37, 100=1.0428, 500=0.9438 (USD)", RoHS="RoHS Compliant", Row Spacing="0.100\" (2.54mm)", Stock 1=8167, Supplier 1=Digi-Key, Termination=Solder
K1 K2 K3 K4: "General Purpose Relay DPST-NO (2 Form A) 24VDC Coil Through Hole", Package=None, Availability="In Stock", Check_prices=https://www.snapeda.com/parts/6-1423008-7/TE%20Connectivity/view-part/6301405/?ref=eda, MF="TE Connectivity / P&B", MP=6-1423008-7, Price=None, Purchase-URL=https://pricing.snapeda.com/search/part/6-1423008-7/?ref=eda, SnapEDA_Link=https://www.snapeda.com/parts/6-1423008-7/TE%20Connectivity/view-part/6301405/?ref=snap
K5 K6 K7 K8 K9 K10 K11 K12 K13 K14 K15 K16 K17 K18 K19 K20 K21 K22 K23 K24: "No Description Available", Mfr_Name="TE Connectivity", Copyright="Copyright (C) 2022 Ultra Librarian. All rights reserved.", Digi-Key_Part_Number_1=PB352-ND, Manufacturer_Part_Number=T92S11D12-24, RefDes=RefDes, Type=DEV
Q1 Q2 Q3 Q4 Q5 Q6 Q7 Q8 Q9 Q10 Q11 Q12 Q13 Q14 Q17 Q18 Q19 Q20 Q21 Q22 Q23 Q24 Q25 Q26 Q27 Q28 Q29 Q30: library part CMP-2000-06281-2, "OPTOISOLATOR 5KV TRANSISTOR 4SMD", Collector Emitter Voltage=70V, Emiiter Collector Voltage=6V, Forward Current=50mA, Forward Voltage=1.2V, Isolation Voltage=5000Vrms, Manufacturer="ON Semiconductor", Max Current Transfer Ratio=600%, Max Junction Temp=+125°C, Min Current Transfer Ratio=300%, Package=709AH, Power Dissipation=70mW, Temperature="-55°C to +110°C", Temperature Range High=+110°C, Temperature Range Low=-55°C, Automotive=No, Category=Trans, ComponentLink2Description=Datasheet, ComponentLink2URL=https://www.onsemi.cn/PowerSolutions/document/FOD814-D.PDF, Device Class L1=Optoelectronics, Device Class L2=Optocouplers, Device Class L3=unset, Digikey Description="OPTOISOLATOR 5KV TRANSISTOR 4SMD", Footprint Url=https://www.onsemi.com/pub/Collateral/709AH.PDF, Height=3.85mm, Lead Free=Yes, Manufacturer Part Number=FOD817DSD, Mouser Description="OPTOISOLATOR 5KV TRANSISTOR 4SMD", Octopart=https://octopart.com/fod817dsd-on+semiconductor-84327554, Reverse Voltage=6V, RoHS=TRUE, Standoff Height=0.35mm
Q15 Q16 Q31 Q32: "No Description Available", Mfr_Name=onsemi, Copyright="Copyright (C) 2022 Ultra Librarian. All rights reserved.", Digi-Key_Part_Number_1=MC1413BDR2GOSCT-ND, Digi-Key_Part_Number_2=MC1413BDR2GOSDKR-ND, Digi-Key_Part_Number_3=MC1413BDR2GOSTR-ND, Manufacturer_Part_Number=MC1413BDR2G, RefDes=RefDes, Type=DEV
R1 R2 R3 R4 R5 R6 R7 R8 R9 R10 R11 R12 R13 R14 R15: "RES 4.7K OHM 1/10W 1% 0603 SMD", Manufacturer="Vishay Dale", Manufacturer Part Number=CRCW06034K70FKEA, Package / Case="0603 (1608 Metric)", Power (Watts)="0.1W, 1/10W", Resistance (Ohms)=4.7k, Supplier Part Number 1=541-4.70KHCT-ND, Temperature Coefficient=±100ppm/°C, TOLERANCE=±1%, Value_Sort=4700, Category=Resistors, ComponentLink1Description=http://www.vishay.com/doc?20035, ComponentLink1URL=http://www.vishay.com/doc?20035, Composition="Thick Film", Features="Automotive AEC-Q200 Qualified", Height="0.020\" (0.50mm)", Number of Terminations=2, Packaging="Cut Tape (CT)", Pricing 1="10=0.081, 50=0.0436, 200=0.0251, 1000=0.01711 (USD)", RoHS="RoHS Compliant", Size / Dimension="0.061\" L x 0.033\" W (1.55mm x 0.85mm)", Stock 1=56790, Supplier 1=Digi-Key, Supplier Device Package="0603 (1608 Metric)", TEXT="1% 0603"
R16: "No Description Available", Mfr_Name="Bourns Electronics", Copyright="Copyright (C) 2022 Ultra Librarian. All rights reserved.", Digi-Key_Part_Number_1=CR2512-J/-000ELFCT-ND, Digi-Key_Part_Number_2=CR2512-J/-000ELFDKR-ND, Digi-Key_Part_Number_3=CR2512-J/-000ELFTR-ND, Manufacturer_Part_Number=CR2512-J/-000ELF, RefDes=RefDes, Type=DEV
"Slave #1" "Slave #2" "Slave #3" "Slave #4": "No Description Available", Mfr_Name=Microchip, Copyright="Copyright (C) 2022 Ultra Librarian. All rights reserved.", Digi-Key_Part_Number_1=MCP23008-E/P-ND, Manufacturer_Part_Number=MCP23008-E/P, RefDes=RefDes, Type=DEV

## Via types
v1: diameter 22, hole 22, Top Layer to Bottom Layer, 41 vias
v2: diameter 40, hole 20, Top Layer to Bottom Layer, 28 vias
v3: diameter 50, hole 28, Top Layer to Bottom Layer, 19 vias
v4: diameter 22, hole 10, Top Layer to Bottom Layer, 3 vias

## Nets (pads, with @x,y where several pads share a name; then routed paths per layer and width w, separated by ;. In a path a pad name is that pad's centre, name@x,y a point inside that pad or via, vN(x,y) a via of type N, cw(c..) or ccw(c..) an arc to the next point about the centre after c; other vN are vias at no path point)
+5: "Slave #1.18" "Slave #2.18" "Slave #3.18" "Slave #4.18" C1.1 C2.1 C3.1 C4.1 J7.1 R3.1 R5.1 R7.2 R8.1 R10.1 R11.1 R12.1 R13.1 | length 14755
  Top Layer w10: C4.1@10100,16181.5 10131.5,16181.5 10150,16200 ; 10250,16300 10150,16200 ; R3.1@10650,15766.54 10650,15650 ; C3.1@12800,16162.99 12804.41,16158.58 12850,16158.58 ; 12950,16300 12850,16200 12850,16158.58 ; R5.1@13250,15766.54 13250,15650 ; C2.1@15350,16181.5 15350.72,16180.78 15400,16180.78 ; 15500,16300 15400,16200 15400,16180.78 ; R10.1@15800,15766.54 R11.1@15900,15766.54 15900,15650 ; C1.1@17950,16150 17994.14,16150 ; 18100,16300 18000,16200 18000,15800 18033.46,15766.54 R7.2@18100,15766.54 R8.1@18200,15766.54 R13.1@18300,15766.54 18300,15650 ; R12.1@18600,15766.54 18600,15650 ; J7.1@20950,16050 20750,16050 20350,15650 18600,15650 ; 10150,16200 10150,15700 10200,15650 10650,15650 ; 10650,15650 12855.86,15650 ; 12850,16158.58 12850,15655.86 12855.86,15650 ; 12855.86,15650 13250,15650 ; 13250,15650 15400,15650 ; 15400,15650 15400,16180.78 ; 15400,15650 15900,15650 ; 15900,15650 18300,15650 ; 18300,15650 18600,15650
+5vr: J6.1 Q1.4 Q2.4 Q3.4 Q4.4 Q5.4 Q6.4 Q7.4 Q8.4 Q9.4 Q10.4 Q11.4 Q12.4 Q13.4 Q14.4 Q17.4 Q18.4 Q19.4 Q20.4 Q21.4 Q22.4 Q23.4 Q24.4 Q25.4 Q26.4 Q27.4 Q28.4 Q29.4 Q30.4 | length 13934.1
  Top Layer w10: Q14.4@9700,14818.9 9700,14894.14 9705.86,14900 10052.93,14900 ; Q13.4@10050,14818.9 10050,14897.07 10052.93,14900 ; Q12.4@10400,14818.9 10400,14900 ; Q11.4@10750,14818.9 10750,14900 ; Q10.4@11050,14818.9 11050,14900 ; Q9.4@11350,14818.9 11350,14900 ; Q8.4@11650,14818.9 11650,14900 ; Q23.4@12250,14818.9 12250,14900 ; Q22.4@12600,14818.9 12600,14900 ; Q21.4@12950,14818.9 12950,14900 ; Q20.4@13300,14818.9 13300,14900 ; Q19.4@13650,14818.9 13650,14900 ; Q18.4@14000,14818.9 14000,14900 ; Q17.4@14350,14818.9 14350,14900 ; Q7.4@14900,14818.9 14900,14900 ; Q6.4@15250,14818.9 15250,14900 ; Q5.4@15600,14818.9 15600,14900 ; Q4.4@15950,14818.9 15950,14900 ; Q3.4@16300,14818.9 16300,14900 ; Q2.4@16650,14818.9 16650,14900 ; Q1.4@17000,14818.9 17000,14900 ; Q30.4@17550,14818.9 17550,14900 ; Q29.4@17900,14818.9 17900,14900 ; Q28.4@18250,14818.9 18250,14900 ; Q27.4@18600,14818.9 18600,14900 ; Q26.4@18950,14818.9 18950,14900 ; Q25.4@19300,14818.9 19300,14900 ; J6.1@21100,14275.59 J6.1@20859.84,14275.59 20124.41,14275.59 19650,14750 Q24.4@19650,14818.9 19650,14900 19300,14900 ; 10052.93,14900 10400,14900 ; 10400,14900 10750,14900 ; 10750,14900 11050,14900 ; 11050,14900 11350,14900 ; 11350,14900 11650,14900 ; 11650,14900 12250,14900 ; 12250,14900 12600,14900 ; 12600,14900 12950,14900 ; 12950,14900 13300,14900 ; 13300,14900 13650,14900 ; 13650,14900 14000,14900 ; 14000,14900 14350,14900 ; 14350,14900 14900,14900 ; 14900,14900 15250,14900 ; 15250,14900 15600,14900 ; 15600,14900 15950,14900 ; 15950,14900 16300,14900 ; 16300,14900 16650,14900 ; 16650,14900 17000,14900 ; 17000,14900 17550,14900 ; 17550,14900 17900,14900 ; 17900,14900 18250,14900 ; 18250,14900 18600,14900 ; 18600,14900 18950,14900 ; 18950,14900 19300,14900
+19: CR1.1 CR2.1 CR3.1 CR4.1 CR5.1 CR6.1 CR7.1 CR8.1 CR9.1 CR10.1 CR11.1 CR12.1 CR13.1 CR14.1 CR15.1 CR16.1 CR17.1 CR18.1 CR19.1 CR20.1 CR21.1 CR22.1 CR23.1 CR24.1 CR25.1 CR26.1 CR27.1 CR28.1 J8.1 K1.0_1 K1.0_2 K2.0_1 K2.0_2 K3.0_1 K3.0_2 K4.0_1 K4.0_2 K5.15 K5.16 K6.15 K6.16 K7.15 K7.16 K8.15 K8.16 K9.15 K9.16 K10.15 K10.16 K11.15 K11.16 K12.15 K12.16 K13.15 K13.16 K14.15 K14.16 K15.15 K15.16 K16.15 K16.16 K17.15 K17.16 K18.15 K18.16 K19.15 K19.16 K20.15 K20.16 K21.15 K21.16 K22.15 K22.16 K23.15 K23.16 K24.15 K24.16 | length 69409.3
  Top Layer w30: CR7.1@9935,13745 CR6.1@10165,13745 CR5.1@10395,13745 CR4.1@10625,13745 CR3.1@10855,13745 CR2.1@11085,13745 CR14.1@11745,13745 CR13.1@12025,13745 CR12.1@12305,13745 CR11.1@12565,13745 CR10.1@12845,13745 CR9.1@13075,13745 CR8.1@13305,13745 13550,13745 ; v3(16450,12850) 14050,12850 13550,13350 13550,13745 ; CR26.1@16450,13745 CR27.1@16130,13745 CR28.1@15840,13745 CR15.1@15440,13745 CR16.1@15160,13745 CR17.1@14880,13745 CR18.1@14600,13745 CR19.1@14320,13745 CR20.1@14040,13745 CR21.1@13750,13745 13550,13745 ; 16513.5,13745 CR25.1@16710,13745 CR24.1@17000,13745 CR23.1@17290,13745 CR22.1@17580,13745 18600,13745 ; K18.15@18418.5,4353 K18.15@18421.5,4350 ; K21.15@18418.5,6147 K21.15@18421.5,6150 ; K17.15@18418.5,7903 K17.15@18421.5,7900 ; K19.15@18418.5,11397 K19.15@18421.5,11400 ; v3(18600,13600) 18600,13745 ; J8.1@21100,13275.59 J8.1@20859.84,13275.59 20851.97,13275.59 20382.56,13745 18600,13745
  Middle 1 w30: K4.0_2@11600,1651.97 K4.0_1@11600,1448.82 11698.82,1350 13500,1350 ; K3.0_2@11600,5351.97 K3.0_1@11600,5148.82 11698.82,5050 13500,5050 ; K2.0_2@11600,8951.97 K2.0_1@11600,8748.82 11698.82,8650 13450,8650 ; K1.0_2@11600,12401.97 K1.0_1@11600,12198.82 11623.94,12198.82 11662.26,12160.5 13450,12160.5 ; K8.16@13350,1703 K8.15@13350,1500 13500,1350 ; K7.16@13350,5403 K7.15@13350,5200 13500,5050 ; K6.16@13350,8953 K6.15@13350,8750 13450,8650 ; K5.16@13350,12453 K5.15@13350,12250 13360.5,12250 13450,12160.5 ; K10.16@15197,1684.5 K10.15@15197,1481.5 15328.5,1350 ; K9.16@15200,8953 K9.15@15200,8750 15300,8650 ; K12.16@15203,5384.5 K12.15@15203,5181.5 15334.5,5050 ; K11.16@15203,12434.5 K11.15@15203,12231.5 15274,12160.5 ; v3(16450,12850) 16453.83,12846.17 16491.61,12846.17 16550,12787.79 ; K14.15@17047,8731.5 K14.16@17047,8934.5 16550,9431.5 ; K13.15@17047,12231.5 K13.16@17047,12434.5 16903.29,12434.5 16550,12787.79 ; K15.15@17053,1481.5 K15.16@17053,1684.5 16550,2187.5 ; K16.15@17053,5181.5 K16.16@17053,5384.5 16550,5887.5 ; K24.16@18197,2550 K24.15@18400,2550 18600,2550 ; K20.16@18215.5,747 K20.15@18418.5,747 18600,928.5 18600,2550 ; K18.16@18215.5,4353 K18.15@18418.5,4353 18597,4353 18600,4350 ; K21.16@18215.5,6147 K21.15@18418.5,6147 18421.5,6150 18600,6150 ; K17.16@18215.5,7903 K17.15@18418.5,7903 18421.5,7900 18600,7900 ; K23.16@18215.5,9650 K23.15@18418.5,9650 18600,9650 ; K19.16@18215.5,11397 K19.15@18418.5,11397 18597,11397 18600,11400 ; K22.16@18215.5,13147 K22.15@18418.5,13147 18597,13147 18600,13150 ; v3(18600,13600) 18600,13150 ; 13450,8650 15300,8650 ; 13450,12160.5 15274,12160.5 ; 13500,1350 15328.5,1350 ; 13500,5050 15334.5,5050 ; 15274,12160.5 16550,12160.5 ; 15300,8650 16550,8650 ; 15328.5,1350 16150,1350 16550,1750 16550,2187.5 ; 15334.5,5050 16550,5050 ; 16550,2187.5 16550,5050 ; 16550,5050 16550,5887.5 ; 16550,5887.5 16550,8650 ; 16550,8650 16550,9431.5 ; 16550,9431.5 16550,12160.5 ; 16550,12160.5 16550,12787.79 ; 18600,2550 18600,4350 ; 18600,4350 18600,6150 ; 18600,6150 18600,7900 ; 18600,7900 18600,9650 ; 18600,9650 18600,11400 ; 18600,11400 18600,13150
GND: 1.1 2.1 3.1 4.1 5.1 6.1 7.1 8.1 9.1 10.1 11.1 12.1 13.1 14.1 15.1 16.1 17.1 18.1 19.1 20.1 21.1 22.1 23.1 24.1 25.1 26.1 27.1 28.1 29.1 30.1 31.1 32.1 33.1 34.1 35.1 36.1 37.1 38.1 39.1 40.1 41.1 42.1 43.1 44.1 45.1 46.1 47.1 48.1 49.1 50.1 51.1 52.1 53.1 54.1 55.1 56.1 "Slave #1.9" "Slave #2.9" "Slave #3.9" "Slave #4.9" C1.2 C2.2 C3.2 C4.2 J7.3 R1.1 R2.1 R4.1 R6.1 R9.1 R14.1 R15.1 | length 20012.1
  Top Layer w10: 26.1@9550,15500 12.1@9700,15500 25.1@9900,15500 11.1@10050,15500 24.1@10250,15500 10350,15500 ; v1(10100,15950) C4.2@10100,16118.5 ; v1(10400,15600) 10350,15550 10350,15500 ; v1(10400,15700) 10400,16012.93 10487.07,16100 10950,16100 11050,16000 ; 10401.02,15766.85 10401.34,15766.54 R1.1@10450,15766.54 R2.1@10550,15766.54 ; v1(12800,15950) C3.2@12800,16100 ; 13099.72,15766.94 13100,15766.66 ; v1(13100,15600) 13050,15550 13050,15500 ; v1(13100,15700) 13100,15766.66 ; R4.1@13150,15766.54 13100.13,15766.54 13100,15766.66 ; R6.1@13350,15766.54 13516.54,15766.54 13750,16000 13650,16100 13187.07,16100 13100,16012.93 13100,15766.66 ; v1(15350,15950) C2.2@15350,16118.5 ; v1(15649.7,15699.09) 15649.7,15699.7 15650,15700 15650,16012.93 15737.07,16100 16200,16100 16300,16000 ; v1(15650,15600) 15650,15500 ; 15650.42,15767.5 15651.38,15766.54 R9.1@15700,15766.54 R9.1@15688.96,15777.58 ; v1(17950,15950) C1.2@17950,16087.01 ; v4(18350,15600) 18350,15500 ; v4(18350,15700) 18400,15700 18450,15750 18450,15766.54 ; R14.1@18400,15766.54 18450,15766.54 ; R15.1@18500,15766.54 18450,15766.54 ; 18900,16000 18800,16100 18537.07,16100 18450,16012.93 18450,15766.54 ; J7.3@20950,15950 20750,15950 20300,15500 41.1@19650,15500 55.1@19500,15500 42.1@19300,15500 56.1@19150,15500 36.1@18950,15500 50.1@18800,15500 37.1@18600,15500 51.1@18450,15500 18350,15500 ; 10350,15500 10.1@10400,15500 23.1@10600,15500 9.1@10750,15500 22.1@10900,15500 8.1@11050,15500 21.1@11200,15500 7.1@11350,15500 28.1@11500,15500 14.1@11650,15500 49.1@12100,15500 35.1@12250,15500 48.1@12450,15500 34.1@12600,15500 47.1@12800,15500 13050,15500 ; 13050,15500 32.1@13300,15500 45.1@13500,15500 31.1@13650,15500 44.1@13850,15500 30.1@14000,15500 43.1@14200,15500 29.1@14350,15500 20.1@14750,15500 6.1@14900,15500 19.1@15100,15500 5.1@15250,15500 18.1@15450,15500 4.1@15600,15500 15650,15500 ; 15650,15500 17.1@15800,15500 3.1@15950,15500 16.1@16150,15500 2.1@16300,15500 15.1@16500,15500 1.1@16650,15500 27.1@16850,15500 13.1@17000,15500 54.1@17400,15500 40.1@17550,15500 53.1@17750,15500 39.1@17900,15500 52.1@18100,15500 38.1@18250,15500 18350,15500
  Middle 1 w10: v1(10100,15950) 10100,15750 10150,15700 v1(10400,15700) v1(10400,15600) ; v1(12800,15950) 12800,15850 12950,15700 v1(13100,15700) v1(13100,15600) ; v1(15350,15950) 15350,15850 15500.91,15699.09 v1(15649.7,15699.09) 15649.85,15698.94 15649.85,15600.15 v1(15650,15600) ; v1(17950,15950) 17950,15750 18000,15700 v4(18350,15700) v4(18350,15600)
Net1_2: 1.2 "Slave #3.11" Q2.1 | length 1581.5
  Top Layer w10: Q2.1@16650,15181.1 16650,15300 ; 1.2@16650,15434.82 16650,15300 ; v1(16750,15300) 16650,15300
  Middle 2 w10: 16200,16300 16200,16250 16750,15700 v1(16750,15300)
Net2_2: 2.2 "Slave #3.12" Q3.1 | length 1496.4
  Top Layer w10: Q3.1@16300,15181.1 16300,15307.96 ; 2.2@16300,15434.82 16300,15307.96 ; v1(16400,15300) 16307.96,15300 16300,15307.96
  Middle 2 w10: 16100,16300 16100,16062.93 16155.5,16007.43 16155.5,15981.57 16181.57,15955.5 16207.43,15955.5 16400,15762.93 v1(16400,15300)
Net3_2: 3.2 "Slave #3.13" Q4.1 | length 1324.4
  Top Layer w10: Q4.1@15950,15181.1 15950,15350 ; 3.2@15950,15434.82 15950,15350 ; v1(16050,15350) 15950,15350
  Middle 2 w10: 16000,16300 16050,16250 v1(16050,15350)
Net4_2: 4.2 "Slave #3.14" Q5.1 | length 1529.5
  Top Layer w10: Q5.1@15600,15181.1 15600,15350 ; 4.2@15600,15434.82 15600,15350 ; v1(15700,15350) 15600,15350
  Middle 2 w10: v1(15700,15350) 15750,15400 15750,15949.64 15755.86,15955.5 15918.43,15955.5 15944.5,15981.57 15944.5,16018.43 15918.43,16044.5 15900,16044.5 15900,16300
Net5_2: 5.2 "Slave #3.15" Q6.1 | length 1505.3
  Top Layer w10: Q6.1@15250,15181.1 15250,15350 ; 5.2@15250,15434.82 15250,15350 ; v1(15350,15350) 15250,15350
  Middle 2 w10: v1(15350,15350) 15350,15706.4 15599.1,15955.5 15618.43,15955.5 15650,15987.07 15650,16012.93 15681.57,16044.5 15688.1,16044.5 15800,16156.4 15800,16300
Net6_2: 6.2 "Slave #3.16" Q7.1 | length 1710.8
  Top Layer w10: Q7.1@14900,15181.1 14900,15350 ; 6.2@14900,15434.82 14900,15350 ; v1(15000,15350) 14900,15350
  Middle 2 w10: v1(15000,15350) 15000,15650 15394.5,16044.5 15594.5,16044.5 15700,16150 15700,16300
Net7_2: 7.2 "Slave #1.11" Q9.1 | length 1440.1
  Top Layer w10: Q9.1@11350,15181.1 11350,15350 ; 7.2@11350,15434.82 11350,15350 ; v1(11400,15350) 11350,15350
  Middle 2 w10: 10950,16300 11400,15850 v1(11400,15350)
Net8_2: 8.2 "Slave #1.12" Q10.1 | length 1357.3
  Top Layer w10: Q10.1@11050,15181.1 11050,15350 ; 8.2@11050,15434.82 11050,15350 ; v1(11100,15350) 11050,15350
  Middle 2 w10: 10850,16300 11100,16050 v1(11100,15350)
Net9_2: 9.2 "Slave #1.13" Q11.1 | length 1274.4
  Top Layer w10: Q11.1@10750,15181.1 10750,15350 ; 9.2@10750,15434.82 10750,15350 ; v1(10800,15350) 10750,15350
  Middle 2 w10: 10750,16300 10800,16250 v1(10800,15350)
Net10_2: 10.2 "Slave #1.14" Q12.1 | length 1365.8
  Top Layer w10: Q12.1@10400,15181.1 10400,15350 ; 10.2@10400,15434.82 10400,15350 ; v1(10500,15350) 10400,15350
  Middle 2 w10: v1(10500,15350) 10500,16012.93 10650,16162.93 10650,16300